# Altium PCB EEG_Electrodesv2.PcbDoc
Units mil, origin at the board's own origin, x right, y up, seen from the top; angles counter-clockwise.
Board outline 5453.53 x 5242.33 mil, 2 copper layers (Top Layer, Bottom Layer), stack 10.984 mil thick; 62 components, 46 nets, 166 pads, 196 vias.
Unrouted connection lines stored in the file: 30.
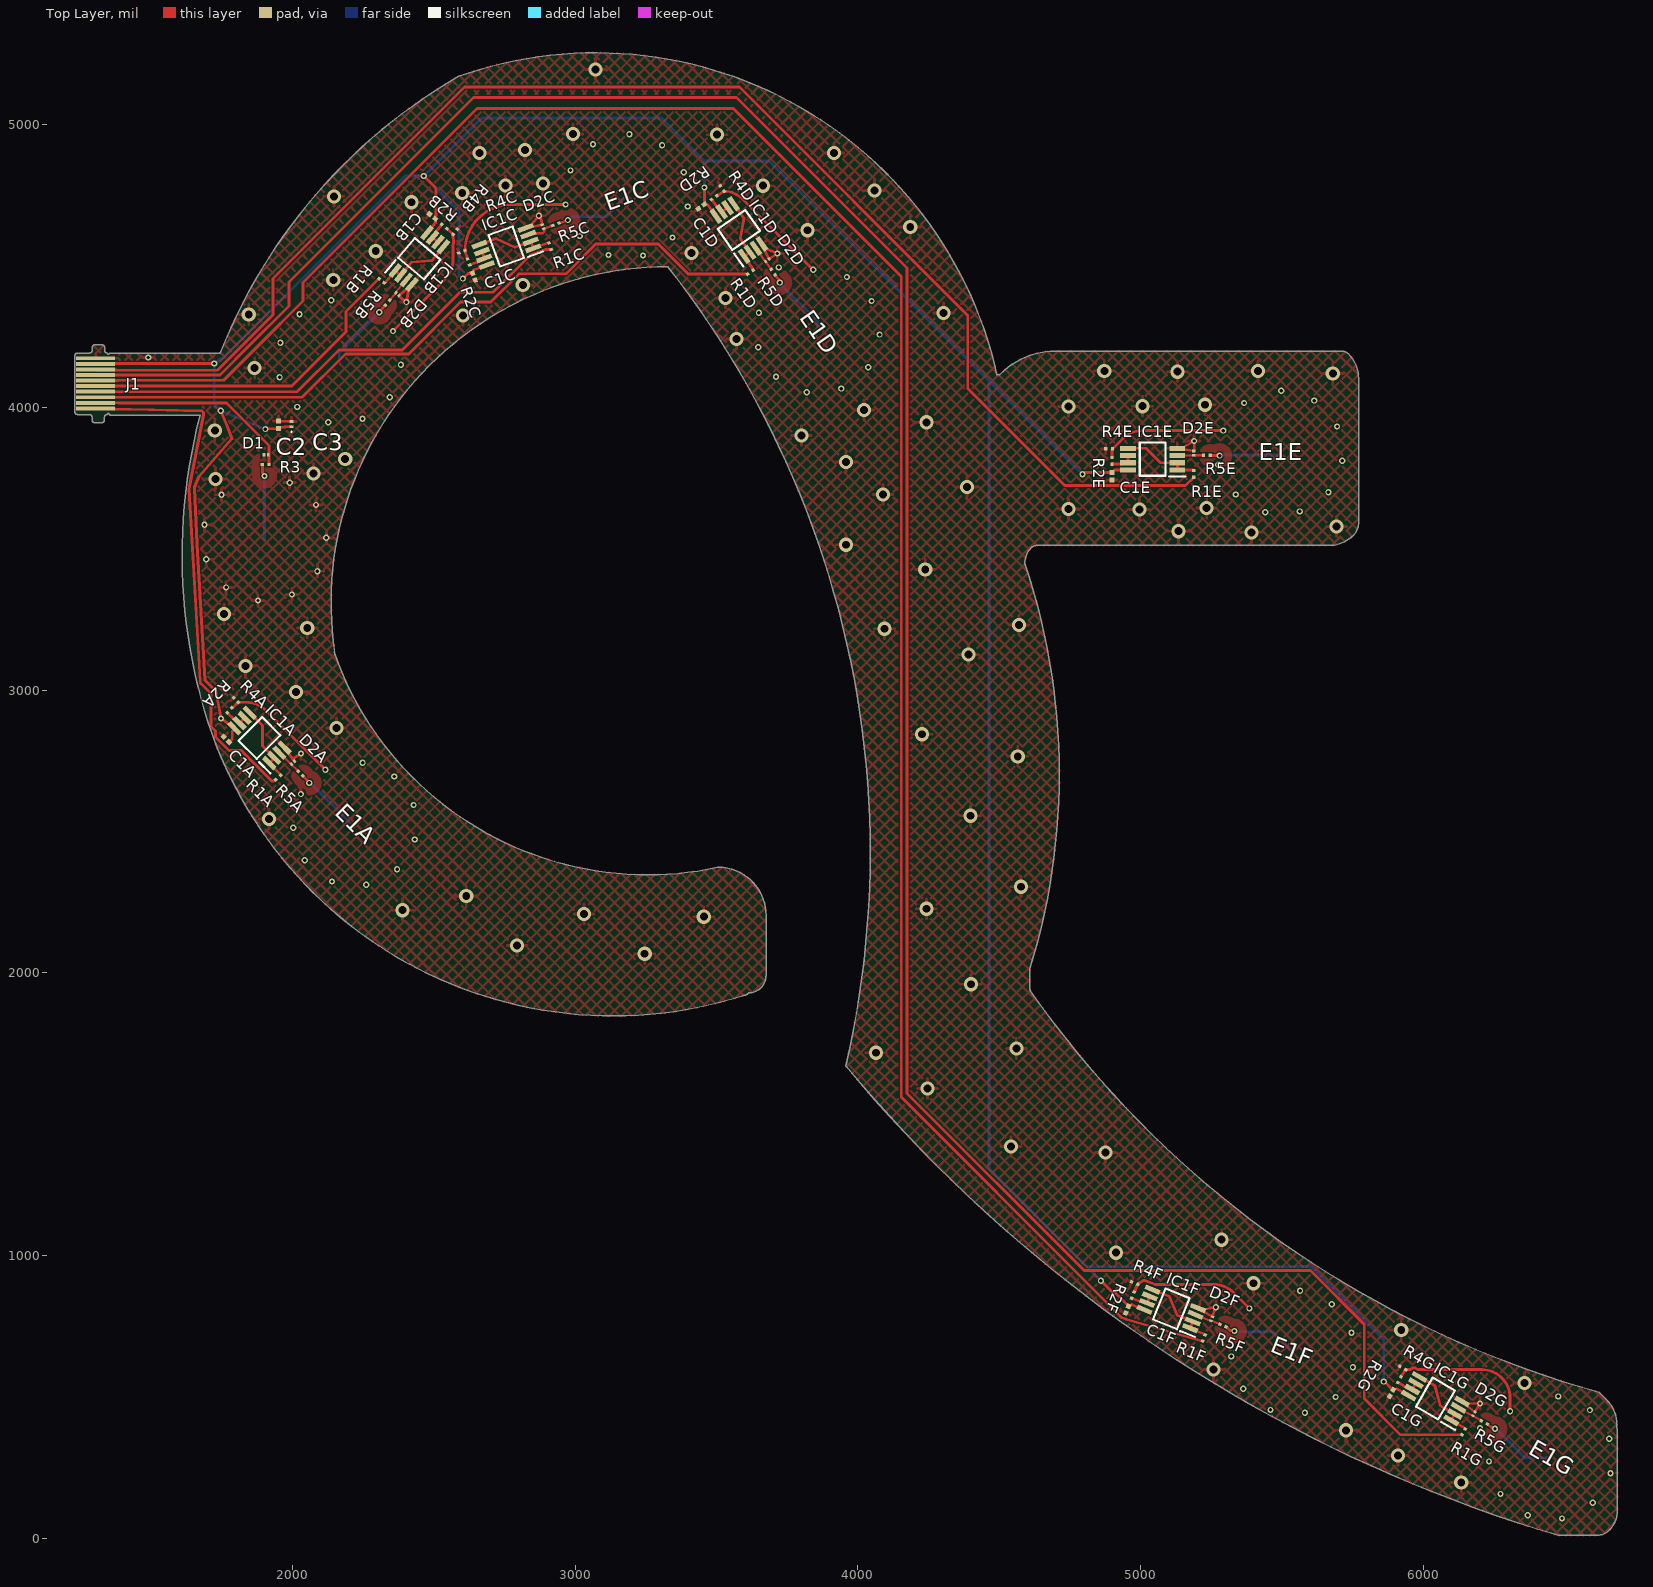
[diagram p0: Top Layer view]
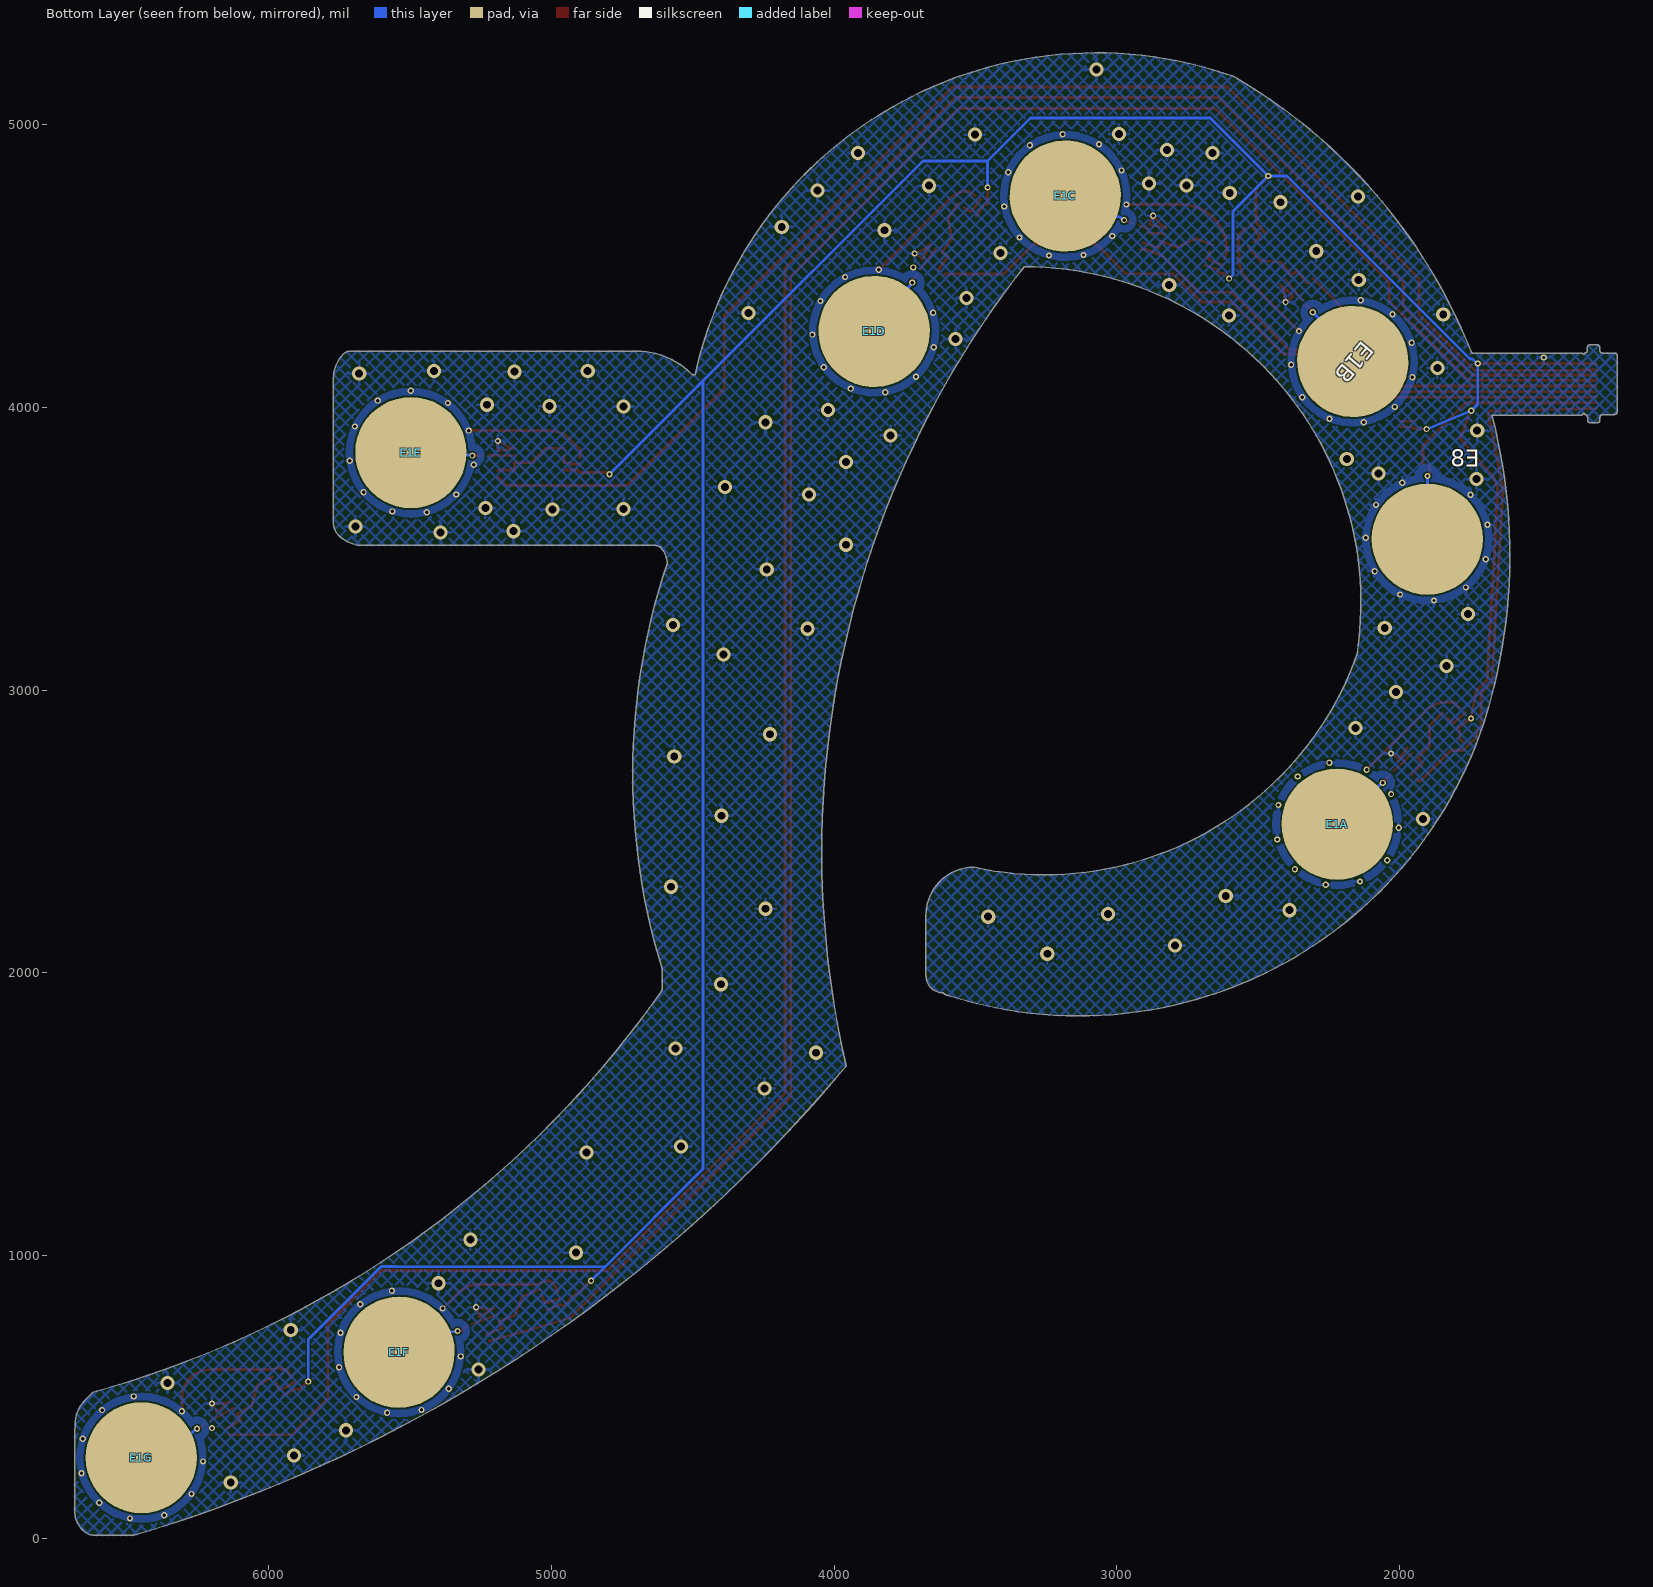
[diagram p1: Bottom Layer view, seen from below]
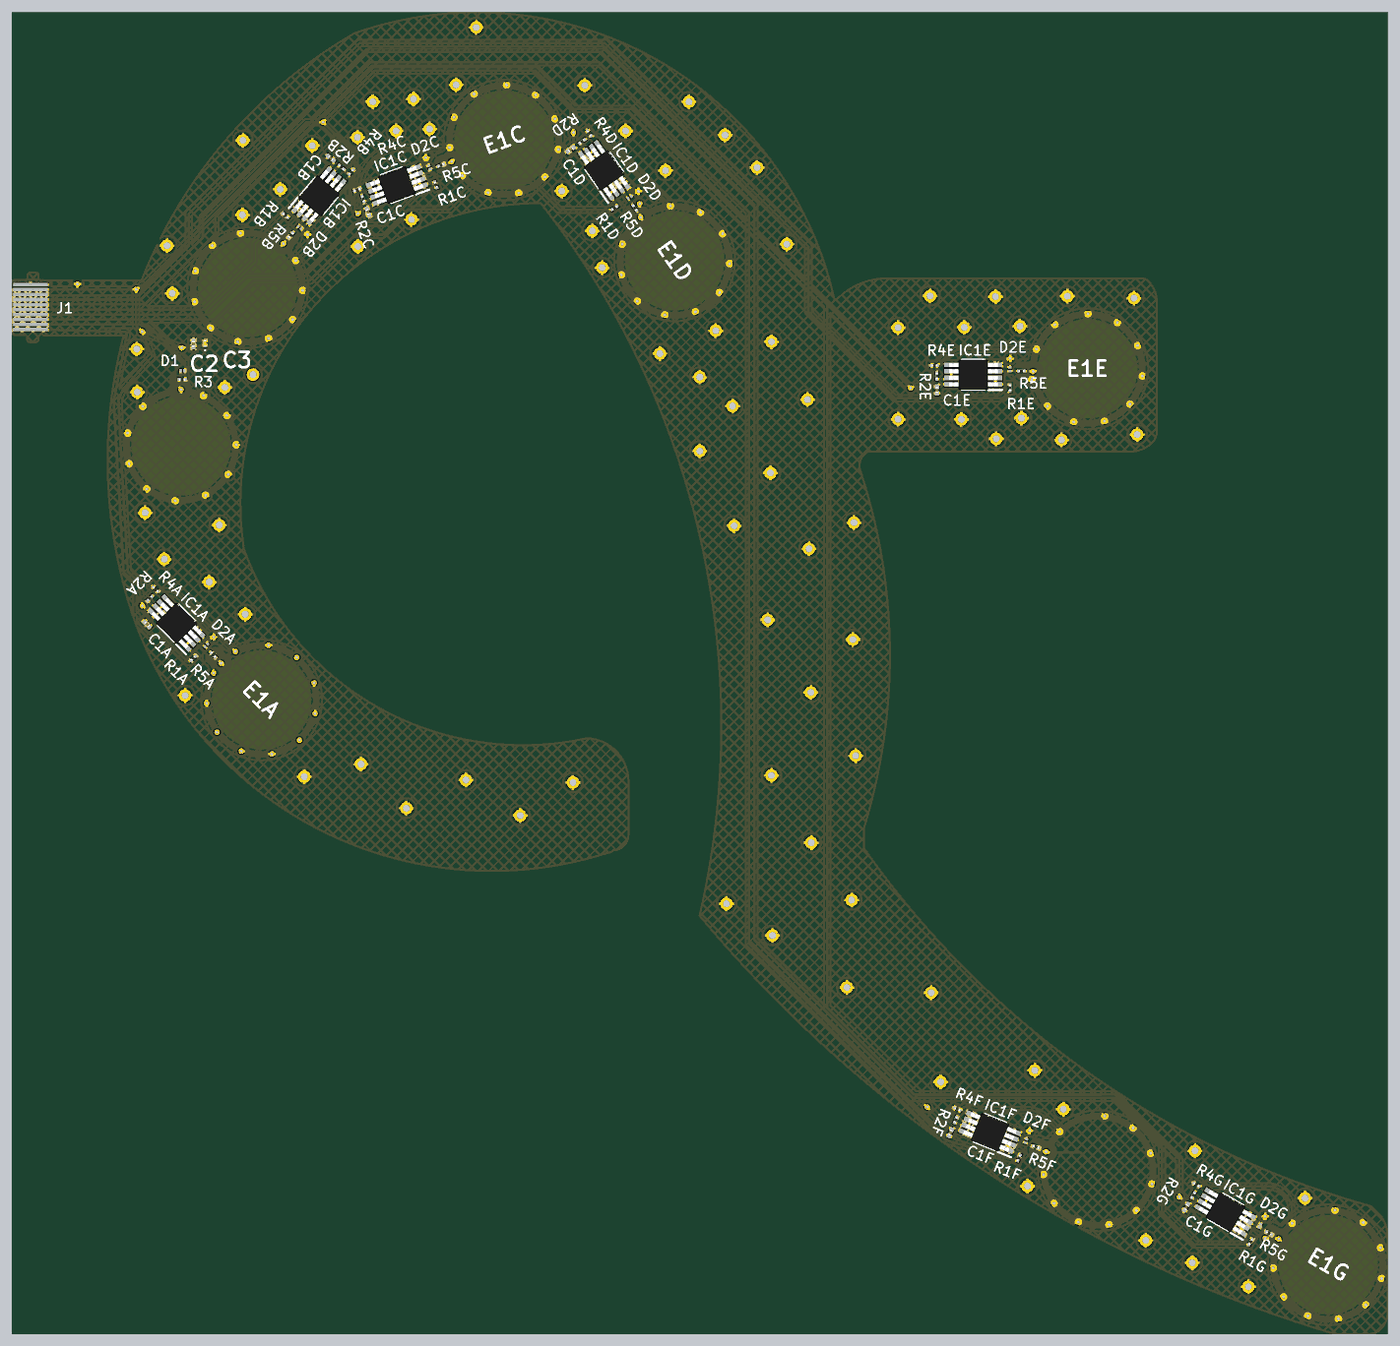
[diagram p2: 3D render of the assembled board from above, using the file's embedded part models]

## Layer stack, top to bottom
Top Stiffener: core 3.937, Core-009, Dk 4.5
Top PI Coverlay: solder mask 0.4921, FC-001, Dk 4
Adhesive 3: prepreg 0.5906, PP-006, Dk 4.1
Top Layer: signal copper 0.4724
Polyimide: core 0.9843, Core-009, Dk 4.5
Bottom Layer: signal copper 0.4724
Adhesive 1: prepreg 0.5906, PP-006, Dk 4.1
Bottom PI Coverlay: solder mask 0.4921, FC-001, Dk 4
Bottom Stifener: core 3.937, Core-009, Dk 4.5

## Board outline
6675.58,57.22 ccw(c6598.65,95.35) 6684.52,95.35 6684.52,375 ccw(c6563.29,375) 6682.9,394.73 6682.9,404.55 ccw(c6561.67,404.55) 6647.39,490.27 6619.75,517.91 6619.52,518.05 cw(c7592.15,4029.48) 4614.39,1929.7 4614.32,1929.77 cw(c4630.15,1945.58) 4607.78,1945.58 4607.78,2015.18 ccw(c2374.24,2704.1) 4711.61,2704.1 ccw(c2374.23,2704.1) 4590.1,3447.93 cw(c4674.07,3447.84) 4597.23,3481.72 cw(c4672.46,3444.39) 4613.08,3503.78 cw(c4632.07,3484.79) 4632.07,3511.64 5665.73,3511.64 ccw(c5665.73,3632.87) 5751.45,3547.15 ccw(c5710.34,3588.26) 5763.77,3565.34 ccw(c5711.95,3591.71) 5770.1,3591.71 5770.1,4102.84 ccw(c5648.87,4102.84) 5734.59,4188.56 ccw(c5710.94,4164.92) 5710.94,4198.36 4697.72,4198.36 ccw(c4697.72,3924.7) 4504.21,4118.2 cw(c4497.2,4125.22) 4497.2,4115.3 4491.2,4115.3 ccw(c3072.79,3800.61) 2587.65,5170.12 2587.56,5170.08 ccw(c3564.58,3477.84) 1746.02,4192.76 cw(c1740.46,4198.53) 1740.46,4190.52 1357.01,4190.52 1352.99,4191.5 cw(c1349.5,4191.5) 1346.02,4191.5 1345.5,4192.02 cw(c1345.5,4201) 1336.52,4201 1336.52,4211 ccw(c1326.5,4211) 1326.5,4221.02 1302.5,4221.02 ccw(c1302.5,4211) 1292.48,4211 1292.48,4201 cw(c1283.5,4201) 1283.5,4192.02 1240.5,4192.02 ccw(c1240.5,4182.5) 1230.98,4182.5 1230.98,3984.5 ccw(c1241,3984.5) 1241,3974.48 1283,3974.48 cw(c1283,3965.5) 1291.98,3965.5 1291.98,3955.5 ccw(c1302,3955.5) 1302,3945.48 1326,3945.48 ccw(c1326,3955.5) 1336.02,3955.5 1336.02,3965.5 cw(c1345,3965.5) 1345,3974.48 1345.52,3975 cw(c1349,3975) 1352.48,3975 1352.63,3974.64 ccw(c1357.83,3979.83) 1357.83,3972.48 1674.19,3972.48 ccw(c3564.58,3477.84) 1668.01,3007.47 1668.63,3004.97 ccw(c3133.61,3354.27) 3593.83,1920.26 ccw(c3593.75,1946.18) 3612.08,1927.85 3614.21,1929.99 ccw(c3614,1991.09) 3675.1,1991.09 3675.1,2203.39 ccw(c3504,2203.39) 3504,2374.49 3503.67,2373.04 cw(c3256.7,3521.44) 3256.7,2346.79 cw(c3256.7,3521.44) 2147.67,3134.31 2149.24,3137.87 cw(c3329.58,3307.84) 2248.83,3811.9 cw(c3327.96,3304.39) 3327.71,4496.91 cw(c688.09,2425.73) 4043.29,2425.73 cw(c688.1,2425.73) 3957.36,1671.24 3957.46,1670.79 ccw(c7953.77,4995.31) 6476.76,11.19 6476.91,11.17 6609.44,11.17 ccw(c6609.44,79.49) 6657.75,31.18 ccw(c6597.03,91.9)

## Design rules (kind name [scope] priority, off if disabled: settings)
Clearance [All] p1: gap=5.91 ignorepadtopadclearanceinfootprint=TRUE except(3.94: Arc-Via Track-Via; 4: Arc-Arc Arc-Track Arc-Fill Arc-Poly Arc-Region Track-Track Track-Fill Track-Poly Track-Region; 7.87: Arc-Hole Track-Hole)
DiffPairsRouting [All] p1: maxlimit=10 minlimit=10 mostfreqgap=10 substack1={F3BC83B4-1280-41FA-B81A-F02A028937D0} toplayer_{f3bc83b4-1280-41fa-b81a-f02a028937d0}_minwidth=15 toplayer_{f3bc83b4-1280-41fa-b81a-f02a028937d0}_maxwidth=15 toplayer_{f3bc83b4-1280-41fa-b81a-f02a028937d0}_prefwidth=15 bottomlayer_{f3bc83b4-1280-41fa-b81a-f02a028937d0}_minwidth=15 bottomlayer_{f3bc83b4-1280-41fa-b81a-f02a028937d0}_maxwidth=15 bottomlayer_{f3bc83b4-1280-41fa-b81a-f02a028937d0}_prefwidth=15 toplayer_minwidth=15 toplayer_maxwidth=15 toplayer_prefwidth=15 bottomlayer_minwidth=15 bottomlayer_maxwidth=15 bottomlayer_prefwidth=15 substack2={A2D3FEF5-FE30-4626-8D47-70568241CDF7} toplayer_{a2d3fef5-fe30-4626-8d47-70568241cdf7}_minwidth=15 toplayer_{a2d3fef5-fe30-4626-8d47-70568241cdf7}_maxwidth=15 toplayer_{a2d3fef5-fe30-4626-8d47-70568241cdf7}_prefwidth=15 bottomlayer_{a2d3fef5-fe30-4626-8d47-70568241cdf7}_minwidth=15 bottomlayer_{a2d3fef5-fe30-4626-8d47-70568241cdf7}_maxwidth=15 bottomlayer_{a2d3fef5-fe30-4626-8d47-70568241cdf7}_prefwidth=15 substack3={83DC7827-F283-41E9-A4D2-CDC3E75DC77D} toplayer_{83dc7827-f283-41e9-a4d2-cdc3e75dc77d}_minwidth=15 toplayer_{83dc7827-f283-41e9-a4d2-cdc3e75dc77d}_maxwidth=15 toplayer_{83dc7827-f283-41e9-a4d2-cdc3e75dc77d}_prefwidth=15 bottomlayer_{83dc7827-f283-41e9-a4d2-cdc3e75dc77d}_minwidth=15 bottomlayer_{83dc7827-f283-41e9-a4d2-cdc3e75dc77d}_maxwidth=15 bottomlayer_{83dc7827-f283-41e9-a4d2-cdc3e75dc77d}_prefwidth=15 maxuncoupledlength=500
MinimumSolderMaskSliver [All] p1: minsoldermaskwidth=3.8
PolygonConnect [All] p1: connectstyle=Relief reliefconductorwidth=10 reliefentries=4 polygonreliefangle="90 Angle" airgapwidth=10
RoomDefinition Designator1 [InComponentClass('Designator1')] p1: confinementstyle=ConfineIn formatcopy=TRUE lockcomponents=FALSE outline 1616.8,2832.65 2221.38,2228.07 2519.78,2526.47 1915.2,3131.04
RoomDefinition Designator4 [InComponentClass('Designator4')] p2: confinementstyle=ConfineIn formatcopy=TRUE lockcomponents=FALSE outline 3316,4674.85 3806.4,3974.47 4152.09,4216.52 3661.68,4916.89
RoomDefinition Designator2 [InComponentClass('Designator2')] p3: confinementstyle=ConfineIn formatcopy=TRUE lockcomponents=FALSE outline 2427.54,4791.88 1877.95,4136.92 2201.22,3865.66 2750.81,4520.63
RoomDefinition Designator3 [InComponentClass('Designator3')] p4: confinementstyle=ConfineIn formatcopy=TRUE lockcomponents=FALSE outline 2642.52,4327.15 3445.96,4619.58 3301.63,5016.13 2498.19,4723.7
RoomDefinition Designator5 [InComponentClass('Designator5')] p5: confinementstyle=ConfineIn formatcopy=TRUE lockcomponents=FALSE outline 4852,3629 5707,3629 5707,4051 4852,4051
RoomDefinition Designator6 [InComponentClass('Designator6')] p6: confinementstyle=ConfineIn formatcopy=TRUE lockcomponents=FALSE outline 4861.37,709.34 5654.11,389.05 5812.2,780.32 5019.46,1100.61
RoomDefinition Designator7 [InComponentClass('Designator7')] p7: confinementstyle=ConfineIn formatcopy=TRUE lockcomponents=FALSE outline 5783.16,427.5 6523.62,0 6734.62,365.46 5994.16,792.96
RoutingVias [All] p1: holewidth=12 width=24 viastyle="Through Hole" minholewidth=11.81 minwidth=21.65 maxholewidth=28 maxwidth=50
SilkToSolderMaskClearance [IsPad] p1: minsilkscreentomaskgap=9.8 clearancetoexposedcopper=TRUE
SolderMaskExpansion [All] p1: expansion=4 istentingtop=FALSE
SupplyNets "Schematic Supply Nets_1" [InNet('VCC')] p1: voltage=0.000
SupplyNets "Schematic Supply Nets" [InNet('GND')] p2: voltage=0.000
Width [All] p1: maxlimit=10 minlimit=4 preferedwidth=10 substack1={F3BC83B4-1280-41FA-B81A-F02A028937D0} toplayer_{f3bc83b4-1280-41fa-b81a-f02a028937d0}_minwidth=10 bottomlayer_{f3bc83b4-1280-41fa-b81a-f02a028937d0}_minwidth=10 substack2={A2D3FEF5-FE30-4626-8D47-70568241CDF7} toplayer_{a2d3fef5-fe30-4626-8d47-70568241cdf7}_minwidth=10 bottomlayer_{a2d3fef5-fe30-4626-8d47-70568241cdf7}_minwidth=10 substack3={83DC7827-F283-41E9-A4D2-CDC3E75DC77D} toplayer_{83dc7827-f283-41e9-a4d2-cdc3e75dc77d}_minwidth=10 bottomlayer_{83dc7827-f283-41e9-a4d2-cdc3e75dc77d}_minwidth=10 minimp=50.000000 maximp=50.000000 favimp=50.000000
27 further rules are at their usual default settings.

## Classes and differential pairs
channel class Electrode: Designator1 Designator2 Designator3 Designator4 Designator5 Designator6 Designator7
component class EEG_Electrodes: C2 C3 D1 E8 J1 R3
component class Designator7: C1G D2G E1G IC1G R1G R2G R4G R5G
component class Designator6: C1F D2F E1F IC1F R1F R2F R4F R5F
component class Designator5: C1E D2E E1E IC1E R1E R2E R4E R5E
component class Designator4: C1D D2D E1D IC1D R1D R2D R4D R5D
component class Designator3: C1C D2C E1C IC1C R1C R2C R4C R5C
component class Designator2: C1B D2B E1B IC1B R1B R2B R4B R5B
component class Designator1: C1A D2A E1A IC1A R1A R2A R4A R5A

## Components (designator, comment, footprint, x,y, rotation, side; value= is the part's Value field where it differs from the comment)
C1A "GRM033R6YA104KE14D" CAPC0603X33N 1767,2826 r135 top (schematic designator C1)
C1B "GRM033R6YA104KE14D" CAPC0603X33N 2495.26,4675.01 r140 top (schematic designator C1)
C1C "GRM033R6YA104KE14D" CAPC0603X33N 2642.31,4462.22 r290 top (schematic designator C1)
C1D "GRM033R6YA104KE14D" CAPC0603X33N 3446.41,4710.01 r215 top (schematic designator C1)
C1E "GRM033R6YA104KE14D" CAPC0603X33N 4898,3756 r270 top (schematic designator C1)
C1F "GRM033R6YA104KE14D" CAPC0603X33N 4951.6,809.86 r248 top (schematic designator C1)
C1G "GRM033R6YA104KE14D" CAPC0603X33N 5886.5,514.49 r240 top (schematic designator C1)
C2 "GRM033R6YA104KE14D" CAPC0603X33N 1951,3938.67 r270 top
C3 "GRM035R61C225ME01D" GRM033D70J224ME01D 1997,3940.67 r90 top
D1 "ESD108B1CSP0201XTSA1" ESD108B1CSP0201XTSA1 1907.48,3832 r0 top
D2A "ESD108B1CSP0201XTSA1" ESD108B1CSP0201XTSA1 2002.05,2743.26 r225 top (schematic designator D2)
D2B "ESD108B1CSP0201XTSA1" ESD108B1CSP0201XTSA1 2372.07,4400.31 r140 top (schematic designator D2)
D2C "ESD108B1CSP0201XTSA1" ESD108B1CSP0201XTSA1 2886.35,4638.52 r290 top (schematic designator D2)
D2D "ESD108B1CSP0201XTSA1" ESD108B1CSP0201XTSA1 3679.87,4519.92 r215 top (schematic designator D2)
D2E "ESD108B1CSP0201XTSA1" ESD108B1CSP0201XTSA1 5187.61,3838.2 r270 top (schematic designator D2)
D2F "ESD108B1CSP0201XTSA1" ESD108B1CSP0201XTSA1 5250.92,777.59 r248 top (schematic designator D2)
D2G "ESD108B1CSP0201XTSA1" ESD108B1CSP0201XTSA1 6178.42,440.87 r240 top (schematic designator D2)
E1A "EEG_Electrode" EEG_Electrode#1 2221.38,2526.47 r315 top (schematic designator E1)
E1B "EEG_Electrode" EEG_Electrode#2 3451.31,5240.5 r310 bottom (schematic designator E1)
E1C "EEG_Electrode" EEG_Electrode#3 3756.38,3170.71 r20 top (schematic designator E1)
E1D "EEG_Electrode" EEG_Electrode#1 3858.22,4268.34 r305 top (schematic designator E1)
E1E "EEG_Electrode" EEG_Electrode#1 5496,3840 r0 top (schematic designator E1)
E1F "EEG_Electrode" EEG_Electrode#3 4909.47,-896.68 r338 top (schematic designator E1)
E1G "EEG_Electrode" EEG_Electrode#1 6449,286 r330 top (schematic designator E1)
E8 "EEG_Electrode" EEG_Electrode#1 1902,3534 r0 top
IC1A "LTC6078ACMS8#TRPBF" SOP65P490X110-8N 1883.95,2831.1 r135 top (schematic designator IC1)
IC1B "LTC6078ACMS8#TRPBF" SOP65P490X110-8N 2449.28,4525.61 r50 top (schematic designator IC1)
IC1C "LTC6078ACMS8#TRPBF" SOP65P490X110-8N 2756.83,4568.62 r200 top (schematic designator IC1)
IC1D "LTC6078ACMS8#TRPBF" SOP65P490X110-8N 3578.82,4626.93 r125 top (schematic designator IC1)
IC1E "LTC6078ACMS8#TRPBF" SOP65P490X110-8N 5042,3816.81 r180 top (schematic designator IC1)
IC1F "LTC6078ACMS8#TRPBF" SOP65P490X110-8N 5107.89,812.3 r158 top (schematic designator IC1)
IC1G "LTC6078ACMS8#TRPBF" SOP65P490X110-8N 6041.61,495.15 r150 top (schematic designator IC1)
J1 "10FHH-SM1-GAN-TF FPC" "10FHH-SM1-GAN-TF FPC" 1373.9,3996.26 r90 top
R1A "ERA-1AEB101C" ERA1A_(0201) 1950.09,2691.3 r45 top (schematic designator R1)
R1B "ERA-1AEB101C" ERA1A_(0201) 2315.78,4447.55 r320 top (schematic designator R1)
R1C "ERA-1AEB101C" ERA1A_(0201) 2911.48,4569.47 r110 top (schematic designator R1)
R1D "ERA-1AEB101C" ERA1A_(0201) 3619.68,4477.77 r35 top (schematic designator R1)
R1E "ERA-1AEB101C" ERA1A_(0201) 5187.61,3764.72 r90 top (schematic designator R1)
R1F "ERA-1AEB101C" ERA1A_(0201) 5223.39,709.46 r68 top (schematic designator R1)
R1G "ERA-1AEB101C" ERA1A_(0201) 6141.68,377.23 r60 top (schematic designator R1)
R2A "ERA-1AEB101C" ERA1A_(0201) 1778.02,2928.81 r45 top (schematic designator R2)
R2B "ERA-1AEB101C" ERA1A_(0201) 2537.39,4639.66 r320 top (schematic designator R2)
R2C "ERA-1AEB101C" ERA1A_(0201) 2623.5,4513.91 r110 top (schematic designator R2)
R2D "ERA-1AEB101C" ERA1A_(0201) 3491.47,4741.56 r35 top (schematic designator R2)
R2E "ERA-1AEB101C" ERA1A_(0201) 4898,3811 r90 top (schematic designator R2)
R2F "ERA-1AEB101C" ERA1A_(0201) 4972.2,860.85 r68 top (schematic designator R2)
R2G "ERA-1AEB101C" ERA1A_(0201) 5914,562.12 r60 top (schematic designator R2)
R3 "ERA1AEB103C" ERA1A_(0201) 1906,3798 r0 top
R4A "AF0201JR-071ML" ERA1A_(0201) 1800.65,2965.58 r315 top (schematic designator R4)
R4B "AF0201JR-071ML" ERA1A_(0201) 2575.99,4620.32 r230 top (schematic designator R4)
R4C "AF0201JR-071ML" ERA1A_(0201) 2599.74,4549.95 r20 top (schematic designator R4)
R4D "AF0201JR-071ML" ERA1A_(0201) 3520.13,4773.84 r305 top (schematic designator R4)
R4E "AF0201JR-071ML" ERA1A_(0201) 4888,3853 r0 top (schematic designator R4)
R4F "AF0201JR-071ML" ERA1A_(0201) 4978.66,903.54 r338 top (schematic designator R4)
R4G "AF0201JR-071ML" ERA1A_(0201) 5926.34,603.49 r330 top (schematic designator R4)
R5A "ERA1AEB103C" ERA1A_(0201) 2029.28,2705.44 r135 top (schematic designator R5)
R5B "ERA1AEB103C" ERA1A_(0201) 2336.77,4369.88 r50 top (schematic designator R5)
R5C "ERA1AEB103C" ERA1A_(0201) 2932.13,4647.23 r200 top (schematic designator R5)
R5D "ERA1AEB103C" ERA1A_(0201) 3700.12,4477.95 r125 top (schematic designator R5)
R5E "ERA1AEB103C" ERA1A_(0201) 5233.61,3830.72 r180 top (schematic designator R5)
R5F "ERA1AEB103C" ERA1A_(0201) 5290.77,753.42 r158 top (schematic designator R5)
R5G "ERA1AEB103C" ERA1A_(0201) 6214.51,411.39 r150 top (schematic designator R5)

## Footprints (in the part's own frame and the unit in brackets; to place one, negate y for a bottom-side part, rotate by r counter-clockwise, add the part's x,y. Pads: shape width x height; smd on the part's side, far side on the other; paste and mask are expansions set on the pad)
"10FHH-SM1-GAN-TF FPC" [mm] "FPC side of 10FHH-SM1-GAN-TF"
  rect 0.35x3.5 smd: 1(0,1.75) 2(0.5,1.75) 3(1,1.75) 4(1.5,1.75) 5(2,1.75) 6(2.5,1.75) 7(3,1.75) 8(3.5,1.75) 9(4,1.75) 10(4.5,1.75)
CAPC0603X33N [mm]
  rect 0.46x0.42 smd: 1(-0.33,0) 2(0.33,0)
  body extent -0.3,-0.15 0.3,0.15, height 0.33
EEG_Electrode#1 [mm] "EEG Electrode ENIG Pad"
  round 10 smd far side paste-10: 1(0,0)
EEG_Electrode#2 [mm] "EEG Electrode ENIG Pad"
  round 10 smd paste-10: 1(0,42.617)
EEG_Electrode#3 [mm] "EEG Electrode ENIG Pad"
  round 10 smd far side paste-10: 1(0,42.617)
ERA1A_(0201) [mm]
  rect 0.3x0.3 smd: 1(-0.3,0) 2(0.3,0)
  body extent -0.3,-0.15 0.3,0.15, height 0.23
ESD108B1CSP0201XTSA1 [mm]
  rect 0.24x0.32 smd: 1(-0.19,0) 2(0.19,0)
GRM033D70J224ME01D [mm]
  rect 0.25x0.35 smd: 1(-0.237,0) 2(0.237,0)
  silkscreen extent -0.75,-0.05 -0.65,0.05, body extent -0.3,-0.15 0.3,0.15, height 0.3
SOP65P490X110-8N [mm]
  rect 1.425x0.45 smd: 1(-2.212,0.975) 2(-2.212,0.325) 3(-2.212,-0.325) 4(-2.212,-0.975) 5(2.212,-0.975) 6(2.212,-0.325) 7(2.212,0.325) 8(2.212,0.975)
  silkscreen extent -2.92,-1.5 1.15,1.55, body extent -2.45,-1.5 2.45,1.5, height 1

## Part data
C1A C1B C1C C1D C1E C1F C1G C2: "Capacitor 0.1uF 0201", Manufacturer_Name="Murata Electronics", Mouser Part Number=81-GRM33R6YA104KE14D, Arrow Part Number=GRM033R6YA104KE14D, Arrow Price/Stock=https://www.arrow.com/en/products/grm033r6ya104ke14d/murata-manufacturing?utm_currency=USD&region=europe, Datasheet Link=https://search.murata.co.jp/Ceramy/image/img/A01X/G101/ENG/GRM033R6YA104KE14-01A.pdf, Height=0.33mm, Manufacturer_Part_Number=GRM033R6YA104KE14D, Mouser Price/Stock=https://www.mouser.co.uk/ProductDetail/Murata-Electronics/GRM033R6YA104KE14D?qs=P%2FC4Eoq9CDwTt3wOuyKhXw%3D%3D
C3: "Capacitor 2.2uF 0201", Manufacturer_Name="Murata Electronics", Mouser Part Number=81-GRM035R61C225ME1D, Datasheet Link=https://search.murata.co.jp/Ceramy/image/img/A01X/G101/ENG/GRM035R61C225ME01-01A.pdf, Height=0.33mm, Manufacturer_Part_Number=GRM035R61C225ME01D, Mouser Price/Stock=https://www.mouser.co.uk/ProductDetail/Murata-Electronics/GRM035R61C225ME01D?qs=DPoM0jnrROXTliYh3Jmu1A%3D%3D
D1 D2A D2B D2C D2D D2E D2F D2G: "TVS Diode (Bi-directional)", Manufacturer_Name=Infineon, Mouser Part Number=726-ESD108B1CSP0201X, Arrow Part Number=ESD108B1CSP0201XTSA1, Arrow Price/Stock=https://www.arrow.com/en/products/esd108b1csp0201xtsa1/infineon-technologies-ag?region=nac, Datasheet Link=https://www.infineon.com/dgdl/Infineon-ESD108-B1-CSP0201-DS-v01_00-EN.pdf?fileId=5546d4624b0b249c014b1746e4d05aa8, Height=0.16mm, Manufacturer_Part_Number=ESD108B1CSP0201XTSA1, Mouser Price/Stock=https://www.mouser.co.uk/ProductDetail/Infineon-Technologies/ESD108B1CSP0201XTSA1?qs=3Bi3m9r5MQZFyNTZtNMRAQ%3D%3D
IC1A IC1B IC1C IC1D IC1E IC1F IC1G: "Integrated Circuit", Manufacturer_Name="Analog Devices", Mouser Part Number=584-C6078ACMS8TRPBF, Arrow Part Number=LTC6078ACMS8#TRPBF, Arrow Price/Stock=https://www.arrow.com/en/products/ltc6078acms8trpbf/analog-devices?region=nac, Datasheet Link=https://datasheet.datasheetarchive.com/originals/distributors/Datasheets_SAMA/f60955edb7006695a84935bb44c6cde2.pdf, Height=1.1mm, Manufacturer_Part_Number=LTC6078ACMS8#TRPBF, Mouser Price/Stock=https://www.mouser.com/Search/Refine.aspx?Keyword=584-C6078ACMS8TRPBF
R1A R1B R1C R1D R1E R1F R1G R2A R2B R2C R2D R2E R2F R2G: "Resistor 100 ohms", Manufacturer_Name=Panasonic, Mouser Part Number=667-ERA-1AEB101C, Arrow Part Number=ERA-1AEB101C, Arrow Price/Stock=https://www.arrow.com/en/products/era-1aeb101c/panasonic?region=nac, Datasheet Link=http://industrial.panasonic.com/cdbs/www-data/pdf/RDM0000/AOA0000C307.pdf, Height=0.26mm, Manufacturer_Part_Number=ERA-1AEB101C, Mouser Price/Stock=https://www.mouser.co.uk/ProductDetail/Panasonic/ERA-1AEB101C?qs=6%252Bc%252B2ke79U4NC8Nf%252Bq1i6A%3D%3D
R3 R5A R5B R5C R5D R5E R5F R5G: "Resistor 10k", Manufacturer_Name=Panasonic, Datasheet Link=http://industrial.panasonic.com/cdbs/www-data/pdf/RDM0000/AOA0000C307.pdf, Height=0.26mm, Manufacturer_Part_Number=ERA1AEB103C
R4A R4B R4C R4D R4E R4F R4G: library part ERA-1AEB101C, "Resistor 1M", Manufacturer_Name=Panasonic, Mouser Part Number=667-ERA-1AEB101C, Arrow Part Number=ERA-1AEB101C, Arrow Price/Stock=https://www.arrow.com/en/products/era-1aeb101c/panasonic?region=nac, Datasheet Link=http://industrial.panasonic.com/cdbs/www-data/pdf/RDM0000/AOA0000C307.pdf, Height=0.26mm, Manufacturer_Part_Number=ERA-1AEB101C, Mouser Price/Stock=https://www.mouser.co.uk/ProductDetail/Panasonic/ERA-1AEB101C?qs=6%252Bc%252B2ke79U4NC8Nf%252Bq1i6A%3D%3D

## Via types
v1: diameter 22, hole 12, Top Layer to Bottom Layer, 89 vias
v2: diameter 50, hole 28, Top Layer to Bottom Layer, 85 vias
v3: diameter 21.65, hole 11.81, Top Layer to Bottom Layer, 22 vias

## Nets (pads, with @x,y where several pads share a name; then routed paths per layer and width w, separated by ;. In a path a pad name is that pad's centre, name@x,y a point inside that pad or via, vN(x,y) a via of type N, cw(c..) or ccw(c..) an arc to the next point about the centre after c; other vN are vias at no path point)
ELECA: E1A.1 R5A.1 | length 255.8
  Top Layer w10: R5A.1 2037.64,2695.87 2060.16,2673.35 v3(2060.16,2672.13)
  Bottom Layer w10: v3(2060.16,2672.13) 2063.31,2672.13 2208.98,2526.47 E1A.1
ELECB: E1B.1 R5B.1 | length 266
  Top Layer w10: v3(2307.49,4336.33) 2327.96,4360.73 R5B.1
  Bottom Layer w10: E1B.1 2166,4194.84 v3(2307.49,4336.33)
ELECC: E1C.1 R5C.1 | length 278.1
  Top Layer w10: R5C.1 2944.33,4650.75 v3(2974.26,4661.64) v3@2975.37,4661.13
  Bottom Layer w10: v3(2974.26,4661.64) 2977.42,4661.64 2989.73,4673.96 3109.1,4673.96 E1C.1
ELECD: E1D.1 R5D.1 | length 262.6
  Top Layer w10: R5D.1 3706.9,4466.07 3721.24,4451.73 3721.24,4443.01 v3(3723.47,4440.78)
  Bottom Layer w10: v3(3723.47,4440.78) 3723.47,4437.62 3858.22,4302.87 E1D.1
ELECE: E1E.1 R5E.1 | length 255.8
  Top Layer w10: R5E.1 5246.29,3829.86 5278.14,3829.86 v3(5279,3829)
  Bottom Layer w10: v3(5279,3829) 5281.23,3831.23 5487.23,3831.23 E1E.1
ELECF: E1F.1 R5F.1 | length 273.6
  Top Layer w10: R5F.1 5303.21,748.99 5315.98,736.23 5328.77,736.23 v3(5331,734)
  Bottom Layer w10: v3(5331,734) 5333.23,731.77 5465.23,731.77 E1F.1
ELECG: E1G.1 R5G.1 | length 273.8
  Top Layer w10: R5G.1 6226.44,405.49 6241.31,390.61 6250.41,390.61 v3(6252.64,388.38)
  Bottom Layer w10: v3(6252.64,388.38) 6255.79,388.38 6358.18,286 E1G.1
GND: C1A.2 C1B.2 C1C.2 C1D.2 C1E.2 C1F.2 C1G.2 C2.1 C3.2 D1.1 D2A.1 D2B.1 D2C.1 D2D.1 D2E.1 D2F.1 D2G.1 IC1A.4 IC1B.4 IC1C.4 IC1D.4 IC1E.4 IC1F.4 IC1G.4 J1.10 R4A.1 R4B.1 R4C.1 R4D.1 R4E.1 R4F.1 R4G.1 | length 1081.5
  Top Layer w9: C2.1 1952.24,3950.42 1996.58,3950.42 C3.2 ; D2C.1@2879.69,4644.77 D2C.1 ; IC1D.4 3670.15,4555.82 3685.15,4525.81 D2D.1 v3(3714.94,4543.79) ; IC1G.4 IC1G.4@6147.51,480.85 ; IC1G.4@6147.51,480.85 6158.8,476.85 v3(6199.47,478.01) 6181.98,447.71 D2G.1 6180.71,448.44 6154.44,469.3 IC1G.4@6147.51,480.85 ; IC1E.4 5152.64,3850.84 5185.81,3845.91 D2E.1 5188.47,3845.91 v3(5188.47,3881.01) 5152.64,3859.56 IC1E.4 ; IC1F.4 5223.22,802.4 5252.14,785.4 D2F.1 5252.27,785.35 v3(5265.47,818.01) 5226.49,810.48 IC1F.4
  Top Layer w10: IC1A.4 1986.25,2777.63 2002.02,2756.77 ; D2A.1@2007.19,2749.92 2002.02,2756.77 ; v3(2031,2776) 2002.02,2756.77 ; D2B.1@2378.45,4394.57 2378.86,4391.24 v3(2403.47,4372.01) 2410.84,4414.09 IC1B.4 2404.93,4419.05 D2B.1@2380.96,4398.23 ; D2C.1@2879.69,4644.77 2848.52,4638.73 IC1C.4 2845.88,4645.98 v3(2871.99,4677.39) 2879.68,4666.55 D2C.1@2884,4647 ; IC1D.4 3676.6,4560.94 v3(3714.94,4543.79)
  other v1: 1878.66,3316.8 1998.74,3338.35 1765.8,3363.14 2088.78,3420.67 1695.63,3462.93 2120.44,3538.5 1689.56,3584.78 2083.75,3654.85 1749.83,3690.86 1990.62,3733.66 1491,4176
  other v2: 6133,199 5910,294 5726,383 6357,550 5257,598 5921,738 5399,903 4913,1011 5286,1057 4875,1365 4541,1386 4246,1592 4064,1718 4560,1733 4400,1960 3246,2068 2794.88,2097.19 3455,2199 3031,2209 2390,2222 4242,2227 2615,2272 4576,2305 1918,2544 4398,2556 4565,2766 4227,2844 2156,2866 2013,2994 1835,3085 4391,3126 4094,3217 2053,3220 4569,3230 1759,3269 4238,3427 3958,3514 5392,3558 5133,3562 5692,3579 4995,3639 4744,3640 5233,3644 4088,3692 4385,3718 1728,3747 2075,3766 3958,3807 3800,3900 1726,3918 4242,3947 4021,3991 4744,4003 5006,4004 5227,4009 5679,4120 5130,4126 5415,4128 4871,4129 1867,4139 3571,4241 2603,4325 1846,4328 4303,4334 3532,4387 2815,4432 2145,4450 3411,4545 2295,4552 3822,4626 4185,4638 2422,4725 2147,4746 2601,4758 4058,4767 2754,4784 3663.92,4783.59 2887,4791 2662,4899 3915,4899 2823,4910 3502,4964 2992,4966 3072,5194
GUARD_RING1A: R2A.2 R4A.2 | length 433.4
  Top Layer w10: R2A.2 ccw(c1786.37,2943.35) 1790.75,2938.97 R4A.2 1836.82,2957.23 cw(c1836.82,2857.23) 1907.53,2927.94 v1(2117.08,2718.39)
  other v1: 2261.87,2311.99 2140.41,2323.46 2370.7,2367.12 2044.31,2398.61 2433.08,2471.97 2003.49,2513.58 2428.98,2593.9 2030.35,2632.59 2360.43,2694.82 2248.53,2743.42
GUARD_RING1B: R2B.2 R4B.2 | length 456.8
  Top Layer w10: v1(2356.02,4269.42) 2539.11,4452.51 ccw(c2468.4,4523.22) 2568.4,4523.22 2568.4,4574.6 cw(c2578.4,4574.55) 2569.33,4578.78 ccw(c2559.48,4583.45) 2570.35,4584.28 2568.49,4610.02 R4B.2 2568.29,4612.55 2546.55,4630.79 R2B.2
  other v1: 2127.08,3947.16 2248.41,3959.86 2017.79,4001.38 2344.24,4035.37 1955.01,4105.99 2384.07,4150.69 1957.88,4227.95 2025.64,4329.41 2137.35,4378.43
GUARD_RING1C: R2C.2 R4C.2 | length 479.5
  Top Layer w10: R2C.2 2620,4526.16 2610.3,4552.83 R4C.2 2610.84,4554.96 cw(c2773.86,4553.99) 2773.86,4717.01 v1(2966.36,4717.01)
  other v1: 3240.1,4536.81 3118.11,4538.43 3344.12,4600.56 3016.34,4605.72 3397.86,4710.09 3384.05,4831.3 2983.5,4837.8 3307.55,4926.34 3063.13,4930.23 3192.05,4965.62
GUARD_RING1D: R2D.2 R4D.2 | length 456.9
  Top Layer w10: R2D.2 3502.4,4748.11 3525.65,4764.38 R4D.2 cw(c3526.91,4675.35) 3589.71,4738.15 v1(3841.57,4486.29)
  other v1: 3819.35,4053.24 3940.67,4066.16 3710.25,4107.84 4036.23,4142 3647.21,4212.29 4076.56,4257.14 3649.92,4334.26 4048.3,4375.82 3960.91,4460.95 3719.85,4494.56
GUARD_RING1E: R2E.2 R4E.2 | length 445.3
  Top Layer w10: R2E.2 4898,3848.63 cw(c4904.18,3848.63) R4E.2 4935.32,3888.51 cw(c5006.03,3817.8) 5006.03,3917.8 v1(5291.92,3917.8)
  other v1: 5440.07,3628.74 5562.02,3631.92 5335.64,3691.82 5663.38,3699.83 5274.02,3797.12 5712.59,3811.46 5693.97,3932.04 5365.36,4015.21 5613.67,4023.88 5496.7,4058.55
GUARD_RING1F: R2F.2 R4F.2 | length 463.2
  Top Layer w10: R2F.2 4977.8,872.3 4988.44,898.62 R4F.2 4990.31,899.81 4995.47,904.98 5008.57,912.56 5014.54,912.56 5050.15,899.13 ; 5050.18,899.12 5257.67,899.12 cw(c5257.67,799.12) 5328.38,869.83 v1(5384.06,814.15)
  other v1: 5580.37,444.88 5458.81,455.29 5688.71,500.96 5362.05,529.6 5750.17,606.35 5320.24,644.21 5745.01,728.24 5675.58,828.56 5563.26,876.18
GUARD_RING1G: R2G.2 R4G.2 | length 507.7
  Top Layer w10: R2G.2 5921.14,572.68 5935.33,597.25 R4G.2 5950,597.58 ccw(c5949.95,607.58) 5957.39,600.89 cw(c5965.52,593.63) 5970.98,603.08 5978.2,598.91 ccw(c5983.17,607.58) 5983.17,597.58 6205.74,597.58 cw(c6205.74,497.58) 6305.74,497.58 v1(6305.74,450.67)
  other v1: 6489.5,71.52 6368.04,82.99 6598.33,126.65 6271.93,158.14 6660.7,231.5 6231.11,273.11 6656.6,353.44 6199.38,390.91 6588.05,454.36 6476.15,502.95
INT1A: IC1A.1 IC1A.2 IC1A.5 R1A.2 | length 280.8
  Top Layer w10: IC1A.5 1894.37,2874.97 1894.37,2802.59 IC1A.2 1936.65,2760.3 1936.65,2759.89 1919.14,2742.38 IC1A.1 1958.44,2702.33 R1A.2
INT1B: IC1B.1 IC1B.2 IC1B.5 R1B.2 | length 280.8
  Top Layer w10: R1B.2 2327.49,4440.19 IC1B.1 2363.96,4482.83 2382.94,4466.91 2383.35,4466.94 IC1B.2 2421.79,4512.76 2493.89,4519.06 IC1B.5
INT1C: IC1C.1 IC1C.2 IC1C.5 R1C.2 | length 280.8
  Top Layer w10: IC1C.5 2721.47,4596.59 2787.07,4566.01 IC1C.2 2843.26,4586.46 2843.64,4586.29 2852.11,4563.01 IC1C.1 2905.02,4581.7 R1C.2
INT1D: IC1D.1 IC1D.2 IC1D.5 R1D.2 | length 280.8
  Top Layer w10: IC1D.5 3596.69,4668.33 3584.12,4597.05 IC1D.2 3618.43,4548.06 3618.35,4547.65 3598.06,4533.45 IC1D.1 3629.81,4487.18 R1D.2
INT1E: IC1E.1 IC1E.2 IC1E.5 R1E.2 | length 280.8
  Top Layer w10: IC1E.5 5018.34,3855.2 5069.52,3804.02 IC1E.2 5129.32,3804.02 5129.61,3803.72 5129.61,3778.95 IC1E.1 5185.72,3778.43 R1E.2
INT1F: IC1F.1 IC1F.2 IC1F.5 R1F.2 | length 280.8
  Top Layer w10: IC1F.5 5100.33,856.75 5128.62,790.13 IC1F.2 5184.06,767.72 5184.22,767.34 5174.95,744.38 IC1F.1 5226.77,722.87 R1F.2
INT1G: IC1G.1 IC1G.2 IC1G.5 R1G.2 | length 280.8
  Top Layer w10: IC1G.5 6040.32,540.22 6059.05,470.31 IC1G.2 6110.84,440.41 6110.95,440.01 6098.56,418.56 IC1G.1 6146.89,390.04 R1G.2
NetD2A_2: D2A.2 IC1A.3 R5A.2 | length 92.1
  Top Layer w8: IC1A.3 D2A.2@1995.54,2737.61 ; D2A.2 R5A.2
NetD2B_2: D2B.2 IC1B.3 R5B.2 | length 92.1
  Top Layer w8: R5B.2 D2B.2 ; D2B.2@2365.87,4406.3 IC1B.3
NetD2C_2: D2C.2 IC1C.3 R5C.2 | length 106.2
  Top Layer w8: IC1C.3 2839.7,4615.84 2885.79,4615.84 2890.47,4620.53 2890.47,4629.92 D2C.2 R5C.2
NetD2D_2: D2D.2 IC1D.3 R5D.2 | length 92.1
  Top Layer w8: IC1D.3 D2D.2@3672.48,4515.48 ; D2D.2 R5D.2
NetD2E_2: D2E.2 IC1E.3 R5E.2 | length 92.1
  Top Layer w8: IC1E.3 D2E.2@5187.01,3829.61 ; D2E.2 R5E.2
NetD2F_2: D2F.2 IC1F.3 R5F.2 | length 92.1
  Top Layer w8: IC1F.3 D2F.2@5247.14,769.84 ; D2F.2 R5F.2
NetD2G_2: D2G.2 IC1G.3 R5G.2 | length 92.1
  Top Layer w8: IC1G.3 D2G.2@6173.6,433.72 ; D2G.2 R5G.2
NetE8_1: E8.1 R3.1 | length 267.2
  Top Layer w10: R3.1 1894.19,3767.96 1902,3760.15 v3(1902,3757)
  Bottom Layer w10: E8.1 v3(1902,3757)
NetIC1A_6: IC1A.6 IC1A.7 R2A.1 | length 84.5
  Top Layer w10: R2A.1 1784.45,2905.68 1785.82,2905.68 1807.87,2883.63 IC1A.7 IC1A.6
NetIC1B_6: IC1B.6 IC1B.7 R2B.1 | length 83.2
  Top Layer w10: IC1B.6 2512.1,4586.58 2498.41,4598.07 IC1B.7 2507.32,4620.69 2528.45,4645.97 R2B.1
NetIC1C_6: IC1C.6 IC1C.7 R2C.1 | length 83.2
  Top Layer w10: R2C.1 2628.08,4503.97 2659.03,4515.3 IC1C.7 2678.05,4530.43 2671.94,4547.23 IC1C.6
NetIC1D_6: IC1D.6 IC1D.7 R2D.1 | length 83.2
  Top Layer w10: R2D.1 3483.05,4734.56 3502.01,4707.6 IC1D.7 3521.55,4693.14 3536.19,4703.39 IC1D.6
NetIC1E_6: IC1E.6 IC1E.7 R2E.1 | length 84.5
  Top Layer w10: R2E.1 4930.89,3799.19 4935.72,3804.02 IC1E.7 IC1E.6
NetIC1F_6: IC1F.6 IC1F.7 R2F.1 | length 83.2
  Top Layer w10: R2F.1 4968.96,850.4 4999.54,838.12 IC1F.7 5023.8,836.63 5030.5,853.21 IC1F.6
NetIC1G_6: IC1G.6 IC1G.7 R2G.1 | length 83.2
  Top Layer w10: R2G.1 5909.33,552.22 5937.91,535.8 IC1G.7 5961.73,530.95 5970.66,546.43 IC1G.6
OUTA: J1.1 R1A.1 | length 1838.7
  Top Layer w10: J1.1 1369.4,3994.59 1372.25,3994.52 1428,3993.07 1680.55,3986.52 1686.3,3980.77 1686.3,3973.47 1634.77,3711.58 1674.49,3028.73 1674.69,3025.31 1677.12,3022.89 1712,2988 1712,2927 1712,2872 1728,2856 1728,2834.59 1776.43,2786.16 1819.7,2786.16 1927.6,2678.26 1935.06,2678.26 1939.75,2682.95 R1A.1
OUTB: J1.5 R1B.1 | length 1201
  Top Layer w10: J1.5 1998,4075 2123.37,4200.37 2190.19,4267.19 2190.19,4338.6 R1B.1
OUTC: J1.4 R1C.1 | length 1814
  Top Layer w10: J1.4 2017.31,4055.31 2165,4203 2389,4203 2593,4407 2710,4407 2840.01,4537.01 2887.19,4554.18 2896.33,4558.38 R1C.1
OUTD: J1.3 R1D.1 | length 2573.1
  Top Layer w10: J1.3 2034.63,4035.63 2188,4189 2412,4189 2595,4372 2701.5,4372 2801.5,4472 2968,4472 3073,4577 3294,4577 3400,4471 R1D.1
OUTE: J1.8 R1E.1 | length 5121.2
  Top Layer w10: J1.8 1306.89,4132.17 1378.42,4132.17 1379.58,4131 1428,4131 1736,4131 1826,4221 1932.19,4327.19 1932.19,4455.19 2609,5132 3581,5132 4388,4325 4388,4066 4730.95,3723.05 5157.75,3723.05 R1E.1
OUTF: J1.6 R1F.1 | length 7832.3
  Top Layer w10: J1.6 1384.1,4094.68 1385,4095.59 1428,4095.59 1757.59,4095.59 1883,4221 2038,4376 2038,4441 2653,5056 3559,5056 4153,4462 4153,1561 4829.02,884.98 4927.91,784.85 ccw(c4935.67,792.51) 4931.56,782.41 4946.92,776.21 ccw(c4951,786.32) 4947.95,775.85 5217.79,698 R1F.1
OUTG: J1.7 R1G.1 | length 9110
  Top Layer w10: J1.7 1352.03,4114.37 1353.07,4114.37 1428,4114.37 1744.37,4114.37 1851,4221 1988,4358 1988,4443 2641,5096 3571,5096 4174,4493 4174,1574 4800,948 5600,948 5790,758 5790,495 5917.99,367.01 R1G.1
Pad8: D1.2 J1.2 R3.2 | length 745.5
  Top Layer w10: J1.2 1384.06,4015.94 1385,4015 1768,4015 1917.81,3865.19 D1.2@1917.81,3829.15 ; D1.2@1915.67,3831.29 D1.2@1917.81,3829.15 ; R3.2 D1.2@1917.81,3829.15
VCC: C1A.1 C1B.1 C1C.1 C1D.1 C1E.1 C1F.1 C1G.1 C2.2 C3.1 IC1A.8 IC1B.8 IC1C.8 IC1D.8 IC1E.8 IC1F.8 IC1G.8 J1.9 | length 12187.9
  Top Layer w10: J1.9 1305.63,4154.37 1723.37,4154.37 v1(1724,4155) ; 1727.7,2999.22 1693.81,3031.96 1693.74,3032.03 cw(c1700.76,3039.15) 1693.69,3032.08 1691,3034.77 1662.96,3516.67 1662.96,3516.73 1654.07,3713.31 1654.07,3717.67 1670.06,3756.06 1786.93,3889.14 1766.63,3941.31 ccw(c1735,3929) 1766.28,3942.16 v1(1747,3988) ; 1727.73,2999.19 cw(c1720.75,2992.03) 1730.58,2993.85 1738.14,2953.14 v3(1748,2900) 1776.2,2879.11 IC1A.8 1795.23,2861.23 1788,2854 1788,2828 1776.81,2816.81 C1A.1 ; v1(1905,3923) 1906.34,3924.34 1949.66,3924.34 C2.2 1951,3926.46 1954.27,3929.73 1973.5,3929.73 1975.11,3931.34 C3.1 ; v3(2465,4818) 2508.46,4774.54 2508.46,4676.62 2504.7,4672.86 2504.7,4667.17 C1B.1 2505.81,4666.15 2506.88,4653.97 IC1B.8 ; v3(2603,4455) 2621.54,4473.54 2636.98,4473.54 C1C.1 2637.6,4475.17 2642.77,4486.25 IC1C.8 ; v3(3457,4777) 3457.35,4776.65 3457.35,4718.26 C1D.1@3457.7,4717.91 ; C1D.1 C1D.1@3457.7,4717.91 ; IC1D.8 3469.74,4715.79 C1D.1@3457.7,4717.91 ; v3(4793.75,3763.25) 4796.91,3763.25 4802.65,3768.99 C1E.1 4898,3769.78 4906.65,3778.43 IC1E.8 ; v3(4859,912) 4904.63,866.37 4912.44,866.37 4956.17,822.63 C1F.1@4956.76,822.63 ; C1F.1 C1F.1@4956.76,822.63 ; IC1F.8 4968.01,827.41 C1F.1@4956.76,822.63 ; v3(5859,555) 5861.51,555 5890.77,525.74 C1G.1 5893.39,526.42 5905.2,529.58 IC1G.8
  Bottom Layer w10: v1@1749.47,3988 v1(1747,3988) ; v1(1905,3923) 1816,3959.61 v1(1747,3988) ; v3(2603,4455) 2590,4468 2590,4693 v3(2465,4818) ; v3(3457,4777) 3457,4871 ; v3(4793.75,3763.25) 4463,4094 ; v3(4859,912) 4810,961 ; v3(5859,555) 5859,704 5601,962 5549,962 5548,961 4810,961 ; v1(1747,3988) 1724,4011 v1(1724,4155) 1727.25,4155 1743.17,4170.92 1751.92,4170.92 2399,4818 v3(2465,4818) ; v3(2465,4818) 2670,5023 3305,5023 3457,4871 ; 3457,4871 3686,4871 4463,4094 ; 4463,4094 4463,1308 4810,961
copper on no net:
  other v2: 2187,3817

## Polygon pours and split planes (outlines as drawn)
GND on Top Layer "GND_L01_P017" (hatched 45Degree grid 30 track 8, remove dead copper, pour order 17): 82 vertices, not listed, extent 1230.98,11.17 6684.52,5253.5
GUARD_RING1F on Top Layer "Top Layer-GUARD_RING1F" (solid, pour order 12): 102 vertices, not listed, extent 5261.79,690.55 5374.45,788.92
GUARD_RING1A on Top Layer "Top Layer-GUARD_RING1A" (solid, pour order 0): 102 vertices, not listed, extent 1996.81,2628.69 2103.61,2737.92
GUARD_RING1G on Top Layer "Top Layer-GUARD_RING1G" (solid, pour order 14): 105 vertices, not listed, extent 6184.2,344.94 6296.09,446.03
GUARD_RING1E on Top Layer "Top Layer-GUARD_RING1E" (solid, pour order 10): 102 vertices, not listed, extent 5207.04,3785.55 5322.45,3872.52
GUARD_RING1D on Top Layer "Top Layer-GUARD_RING1D" (solid, pour order 8): 99 vertices, not listed, extent 3666.32,4397.33 3766.92,4508.85
GUARD_RING1C on Top Layer "Top Layer-GUARD_RING1C" (solid, pour order 6): 105 vertices, not listed, extent 2903.31,4611.34 3017.71,4705.16
GUARD_RING1B on Top Layer "Top Layer-GUARD_RING1B" (solid, pour order 4): 103 vertices, not listed, extent 2264.04,4292.88 2369.85,4401.51
GND on Top Layer "Top Layer-GND" (solid, pour order 2): 100 vertices, not listed, extent 1855.81,3713.55 1945.45,3836.38
GND on Bottom Layer "GND_L02_P018" (hatched 45Degree grid 30 track 8, remove dead copper, pour order 18): 82 vertices, not listed, extent 1230.98,11.17 6684.52,5253.5
GUARD_RING1F on Bottom Layer "Bottom Layer-GUARD_RING1F" (solid, pour order 13): 191 vertices, not listed, extent 5287.55,429.31 5767.69,888.69
GUARD_RING1A on Bottom Layer "Bottom Layer-GUARD_RING1A" (solid, pour order 1): 195 vertices, not listed, extent 1991.7,2296.79 2451.06,2756.15
GUARD_RING1G on Bottom Layer "Bottom Layer-GUARD_RING1G" (solid, pour order 15): 196 vertices, not listed, extent 6209.19,56.32 6678.68,515.68
GUARD_RING1E on Bottom Layer "Bottom Layer-GUARD_RING1E" (solid, pour order 11): 193 vertices, not listed, extent 5235.55,3610.25 5725.68,4069.75
GUARD_RING1D on Bottom Layer "Bottom Layer-GUARD_RING1D" (solid, pour order 9): 192 vertices, not listed, extent 3628.66,4038.78 4087.78,4497.89
GUARD_RING1C on Bottom Layer "Bottom Layer-GUARD_RING1C" (solid, pour order 7): 193 vertices, not listed, extent 2930.82,4517.82 3412.07,4976.93
GUARD_RING1B on Bottom Layer "Bottom Layer-GUARD_RING1B" (solid, pour order 5): 197 vertices, not listed, extent 1936.44,3932.44 2395.55,4391.56
GND on Bottom Layer "Bottom Layer-GND" (solid, pour order 3): 195 vertices, not listed, extent 1672.32,3304.25 2131.68,3800.52

## Silkscreen, mask and mechanical layers (free items; w line width, h text height)
Mechanical 1:
  lines w1: 1353.5,4191.5 cw(c1349.5,4191.5) 1345.5,4191.5 cw(c1345.5,4201) 1336,4201 1336,4211 ccw(c1326.5,4211) 1326.5,4220.5 1302.5,4220.5 ccw(c1302.5,4211) 1293,4211 1293,4201 cw(c1283.5,4201) 1283.5,4191.5 1240.5,4191.5 ccw(c1240.5,4182.5) 1231.5,4182.5 1231.5,3984.5 ccw(c1241,3984.5) 1241,3975 1283,3975 cw(c1283,3965.5) 1292.5,3965.5 1292.5,3955.5 ccw(c1302,3955.5) 1302,3946 1326,3946 ccw(c1326,3955.5) 1335.5,3955.5 1335.5,3965.5 cw(c1345,3965.5) 1345,3975 cw(c1349,3975) 1353,3975 ccw(c1357.83,3979.83) 1357.83,3973 1492,3973 1675,3973 ; 1353.63,4191.4 ccw(c1357.01,4194.78) 1357.01,4190 1492,4190 1740.46,4190 1740.96,4190 ccw(c1740.96,4197.66) 1746.38,4192.24 ; 1674.87,3973.03 ccw(c3564.58,3477.84) 1668.51,3007.6 1669.13,3005.09 ; 2406.49,4417.84 2408.1,4414.38 ; 2423.08,4536.4 ccw(c2430.47,4540.66) 2428.26,4532.42 ; 1669.13,3005.09 ccw(c3133.61,3354.27) 3593.75,1920.78 ; 1669.13,3005.09 ccw(c3133.61,3354.27) 3593.75,1920.78 ; 1746.38,4192.24 cw(c3564.58,3477.84) 2587.82,5169.64 ; 1746.38,4192.24 1746.38,4192.24 ; 2147.11,3134.35 cw(c3327.96,3304.39) 3327.96,4497.42 ; 2147.11,3134.35 cw(c3327.96,3304.39) 3327.96,4497.42 ; 2147.11,3134.34 ccw(c3256.7,3521.44) 3504.29,2372.65 ; 2147.11,3134.34 ccw(c3256.7,3521.44) 3504.29,2372.65 ; 2587.82,5169.64 cw(c3072.79,3800.61) 4490.79,4114.79 ; 2587.82,5169.64 cw(c3072.79,3800.61) 4490.79,4114.79 ; 3327.96,4497.42 cw(c688.09,2425.73) 3957.86,1671.12 ; 3327.96,4497.42 cw(c688.09,2425.73) 3957.86,1671.12 ; 3504,2373.97 cw(c3504,2203.39) 3674.58,2203.39 ; 3504,2373.97 cw(c3504,2203.39) 3674.58,2203.39 ; 3504,2373.97 3504.29,2372.65 ; 3593.75,1920.78 ccw(c3593.75,1946.18) 3611.71,1928.22 ; 3593.75,1920.78 ccw(c3593.75,1946.18) 3611.71,1928.22 ; 3611.71,1928.22 3614,1930.51 ; 3614,1930.51 ccw(c3614,1991.09) 3674.58,1991.09 ; 3614,1930.51 ccw(c3614,1991.09) 3674.58,1991.09 ; 3674.58,1991.09 3674.58,2203.39 ; 3674.58,1991.09 3674.58,2203.39 ; 3957.86,1671.12 ccw(c7953.77,4995.31) 6476.91,11.69 ; 3957.86,1671.12 ccw(c7953.77,4995.31) 6476.91,11.69 ; 4490.79,4114.79 ccw(c4491.74,4115.74) 4491.74,4114.39 4502.96,4114.39 ; 4502.96,4114.39 cw(c4696.1,3921.26) 4696.1,4194.39 ; 4502.96,4114.39 cw(c4696.1,3921.26) 4696.1,4194.39 ; 4587.96,3444.39 cw(c4672.46,3444.39) 4612.71,3504.14 ; 4587.96,3444.39 cw(c2372.61,2700.65) 4607.26,2017.07 4607.26,1945.58 ccw(c4630.15,1945.58) 4613.96,1929.4 ccw(c7592.15,4029.48) 6619.38,517.55 6647.03,489.9 cw(c6561.67,404.55) 6682.38,404.55 6682.38,371.55 ; 4587.96,3444.39 cw(c4672.46,3444.39) 4612.71,3504.14 ; 4612.71,3504.14 cw(c4632.07,3484.78) 4632.07,3512.16 ; 4612.71,3504.14 cw(c4632.07,3484.78) 4632.07,3512.16 ; 4632.07,3512.16 5665.73,3512.16 ; 4632.07,3512.16 4747.33,3512.16 5665.73,3512.16 ; 4696.1,4194.39 5709.32,4194.39 ; 4696.1,4194.39 5709.32,4194.39 ; 5665.73,3512.16 ccw(c5665.73,3632.87) 5751.08,3547.51 ; 5665.73,3512.16 ccw(c5665.73,3632.87) 5751.08,3547.51 ; 5709.32,4194.39 cw(c5709.32,4161.46) 5732.61,4184.75 ; 5709.32,4194.39 cw(c5709.32,4161.46) 5732.61,4184.75 ; 5732.61,4184.75 cw(c5647.25,4099.39) 5767.96,4099.39 ; 5732.61,4184.75 cw(c5647.25,4099.39) 5767.96,4099.39 ; 5751.08,3547.51 ccw(c5710.34,3588.26) 5767.96,3588.26 ; 5751.08,3547.51 ccw(c5710.34,3588.26) 5767.96,3588.26 ; 5767.96,3588.26 5767.96,4099.39 ; 5767.96,3588.26 5767.96,4099.39 ; 6476.91,11.69 6609.44,11.69 ; 6476.91,11.69 6609.44,11.69 ; 6609.44,11.69 ccw(c6609.44,79.49) 6657.38,31.55 ; 6609.44,11.69 ccw(c6609.44,79.49) 6657.38,31.55 ; 6657.38,31.55 ccw(c6597.03,91.9) 6682.38,91.9 ; 6657.38,31.55 ccw(c6597.03,91.9) 6682.38,91.9 ; 6682.38,91.9 6682.38,371.55 ; 6682.38,91.9 6682.38,371.55
BotStiffener:
  lines w1: 1232,3983.11 ccw(c1239.61,3983.11) 1239.61,3975.5 1285.17,3975.5 cw(c1285.47,3967.98) 1293,3967.85 1293,3954.11 ccw(c1300.61,3954.11) 1300.61,3946.5 1326.5,3946.5 ccw(c1326.5,3956) 1336,3956 1336,3966 cw(c1345.5,3966) 1345.5,3975.5 cw(c1349.2,3975.5) 1349.2,3979.2 1349.8,3979.2 cw(c1349.86,3975.52) 1353.5,3975 1428,3975 1428,4192 1354,4192 cw(c1350.3,4192) 1350.3,4188.3 1349.7,4188.3 cw(c1349.7,4192) 1346,4192 1345.16,4192 cw(c1345.16,4200.57) 1336.59,4200.57 1336.59,4213.3 ccw(c1328.89,4213.3) 1328.89,4221 1303,4221 ccw(c1303,4211.5) 1293.5,4211.5 1293.5,4199.83 cw(c1285.98,4199.53) 1285.85,4192 1241,4192 ccw(c1241,4183) 1232,4183 1232,3985 1232,3983.11 ; 1681.05,2896.05 1827.59,3042.59 ccw(c1824.18,3046) 1829,3046 cw(c1829,3021.87) 1846.07,3038.93 2099,2786 1953.5,2640.5 1681.05,2896.05 ; 1815,3987 1816,3986 1817,3762 2031,3764 2035,3986 1815,3987 ; 2260,4446 2411,4306 2959,4563 2904,4711 2604,4620 2485,4716 2487,4716 2260,4446 ; 3424,4695 3425,4693 3604,4802 3777,4526 3614,4420 3424,4695 ; 4855,3926 5238,3927 5237,3927 5233,3709 4858,3698 4855,3926 ; 4913,791 4967,959 5320,840 5267,651 4913,791 ; 5838,494 5907,655 6264,508 6172,328 5838,494
  text "PI Stiffener with gold fingers / Gold Fingers: 0.3mm / Polyimide Thickness: 0.25mm / Stiffener location: Refer to BotStiffener mechanical layer" at 108,4417 h60